# EAGLE board Torture_Device (EAGLE 9.7.0)

Size 275.27 x 140.99 mm. Coordinates in mm from the lower left corner, seen from the top.
Outline: 0,0 275.27,0 275.27,140.99 0,140.99 0,0
Copper layers (1*16): Top 0.035mm / dielectric 1.5mm / Bottom 0.035mm
Design rules "default": minimum track width 6mil, minimum drill 0.35mm, track to track 6mil, track to pad 6mil, pad to pad 6mil, via to via 6mil, smd to smd 6mil, copper to edge 40mil, drill to drill 6mil, minimum pad ring 10mil, minimum via ring 8mil, stop-mask expansion 4mil, vias tented up to drill 0mil, thermal gap 10mil

## Footprints (pad centres in the part's own frame; a part is rotated, then mirrored left to right if it is on the bottom)
BATTERY-GENERIC = drill 1.118 pad 3.15 octagon: + 2.54,0; - -2.54,0
1X08 = drill 1.016 long: 1 -8.89,0; 2 -6.35,0; 3 -3.81,0; 4 -1.27,0; 5 1.27,0; 6 3.81,0; 7 6.35,0; 8 8.89,0
SG90 = drill 1.016 long: 1 -2.54,0; 2 0,0; 3 2.54,0
TO92 = drill 0.813 octagon: 1 -1.27,0; 2 0,1.905; 3 1.27,0
ARDUINO-UNO-R3-SHIELD = drill 1.016 pad 1.88: 3.3V 24.13,-2.54; 5V 24.13,0; A0 24.13,12.7; A1 24.13,15.24; A2 24.13,17.78; A3 24.13,20.32; A4 24.13,22.86; A5 24.13,25.4; AREF -24.13,-13.97; D2 -24.13,20.32; D3 -24.13,17.78; D4 -24.13,15.24; D5 -24.13,12.7; D6 -24.13,10.16; D7 -24.13,7.62; D8 -24.13,3.81; D9 -24.13,1.27; D10 -24.13,-1.27; D11 -24.13,-3.81; D12 -24.13,-6.35; D13 -24.13,-8.89; GND@0 24.13,2.54; GND@1 24.13,5.08; GND@2 -24.13,-11.43; IOREF 24.13,-7.62; NC 24.13,-10.16; RES 24.13,-5.08; RX -24.13,25.4; SCL -24.13,-19.05; SDA -24.13,-16.51; TX -24.13,22.86; VIN 24.13,7.62

## Placement (x,y rotation side)
BAT1  POTATO  [BATTERY-GENERIC]  11.42,132.73 0 top
JP2  PINHD-1X08_1X08M  [1X08]  13.34,66.85 180 top
JP3  PINHD-1X08_1X08M  [1X08]  266.93,80.48 270 top
JP4  PINHD-1X08_1X08M  [1X08]  268.72,15.92 270 top
SERVO1  SERVOSG90  [SG90]  268.29,41.61 0 top
SERVO2  SERVOSG90  [SG90]  266.92,106.58 0 top
T1  NPN  [TO92]  203.66,80.84 180 top
U2  ARDUINO-UNO-R3-SHIELD  [ARDUINO-UNO-R3-SHIELD]  182.43,29.84 270 top

## Library data of the parts
BAT1 JP2-JP4 SERVO1 SERVO2 U2 = Tinkercad
T1 = Tinkercad; CATEGORY: Transistor; SUB-CATEGORY: BJT; TYPE: NPN

## Nets
BAT1+: BAT1.+ JP3.6 JP4.7
T1_E: JP2.2 T1.3
U2_5V: SERVO1.2 SERVO2.2 T1.1 U2.5V
U2_D5: SERVO2.3 U2.D5
U2_D6: SERVO1.3 U2.D6
U2_D7: T1.2 U2.D7
U2_GND: JP2.7 SERVO1.1 SERVO2.1 U2.GND@0 U2.GND@1 U2.GND@2

## Tracks (layer width: path | path; a pad name or v marks a point on that pad's centre or on a via)
BAT1+  (2 unrouted)
T1_E  (1 unrouted)
U2_5V  (3 unrouted)
U2_D5  (1 unrouted)
U2_D6  (1 unrouted)
U2_D7  (1 unrouted)
U2_GND  (5 unrouted)